# Altium PCB TennisButler PCB.PcbDoc (part 1 of 3)
Units mm, origin at the board's own origin, x right, y up, seen from the top; angles counter-clockwise.
Board outline 100 x 100 mm, 2 copper layers (Top Layer, Bottom Layer), stack 1.671 mm thick; 98 components, 100 nets, 459 pads, 232 vias.
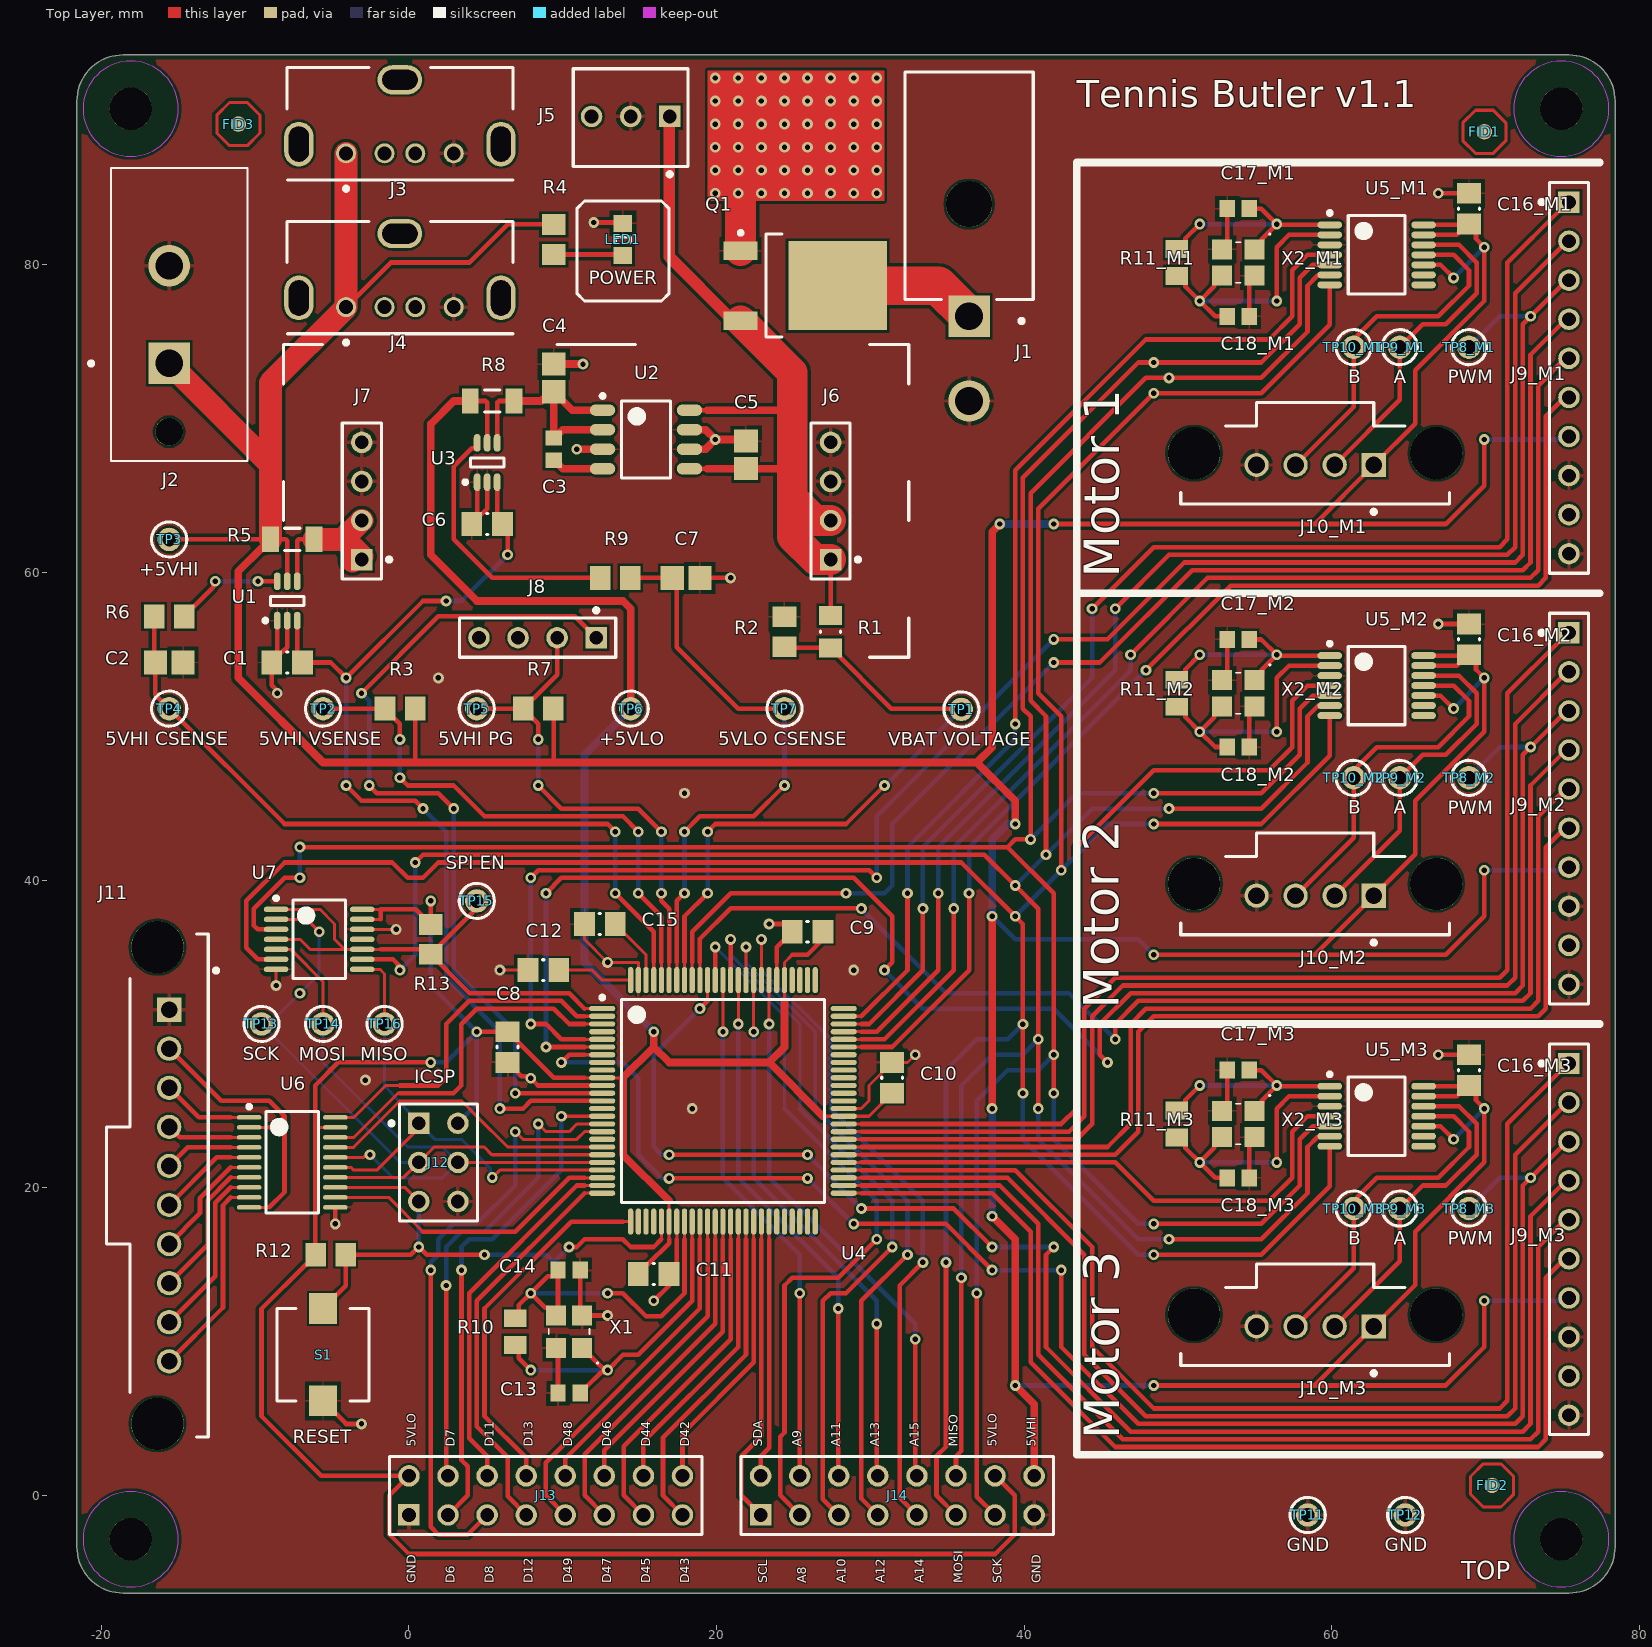
[diagram p0: Top Layer view]
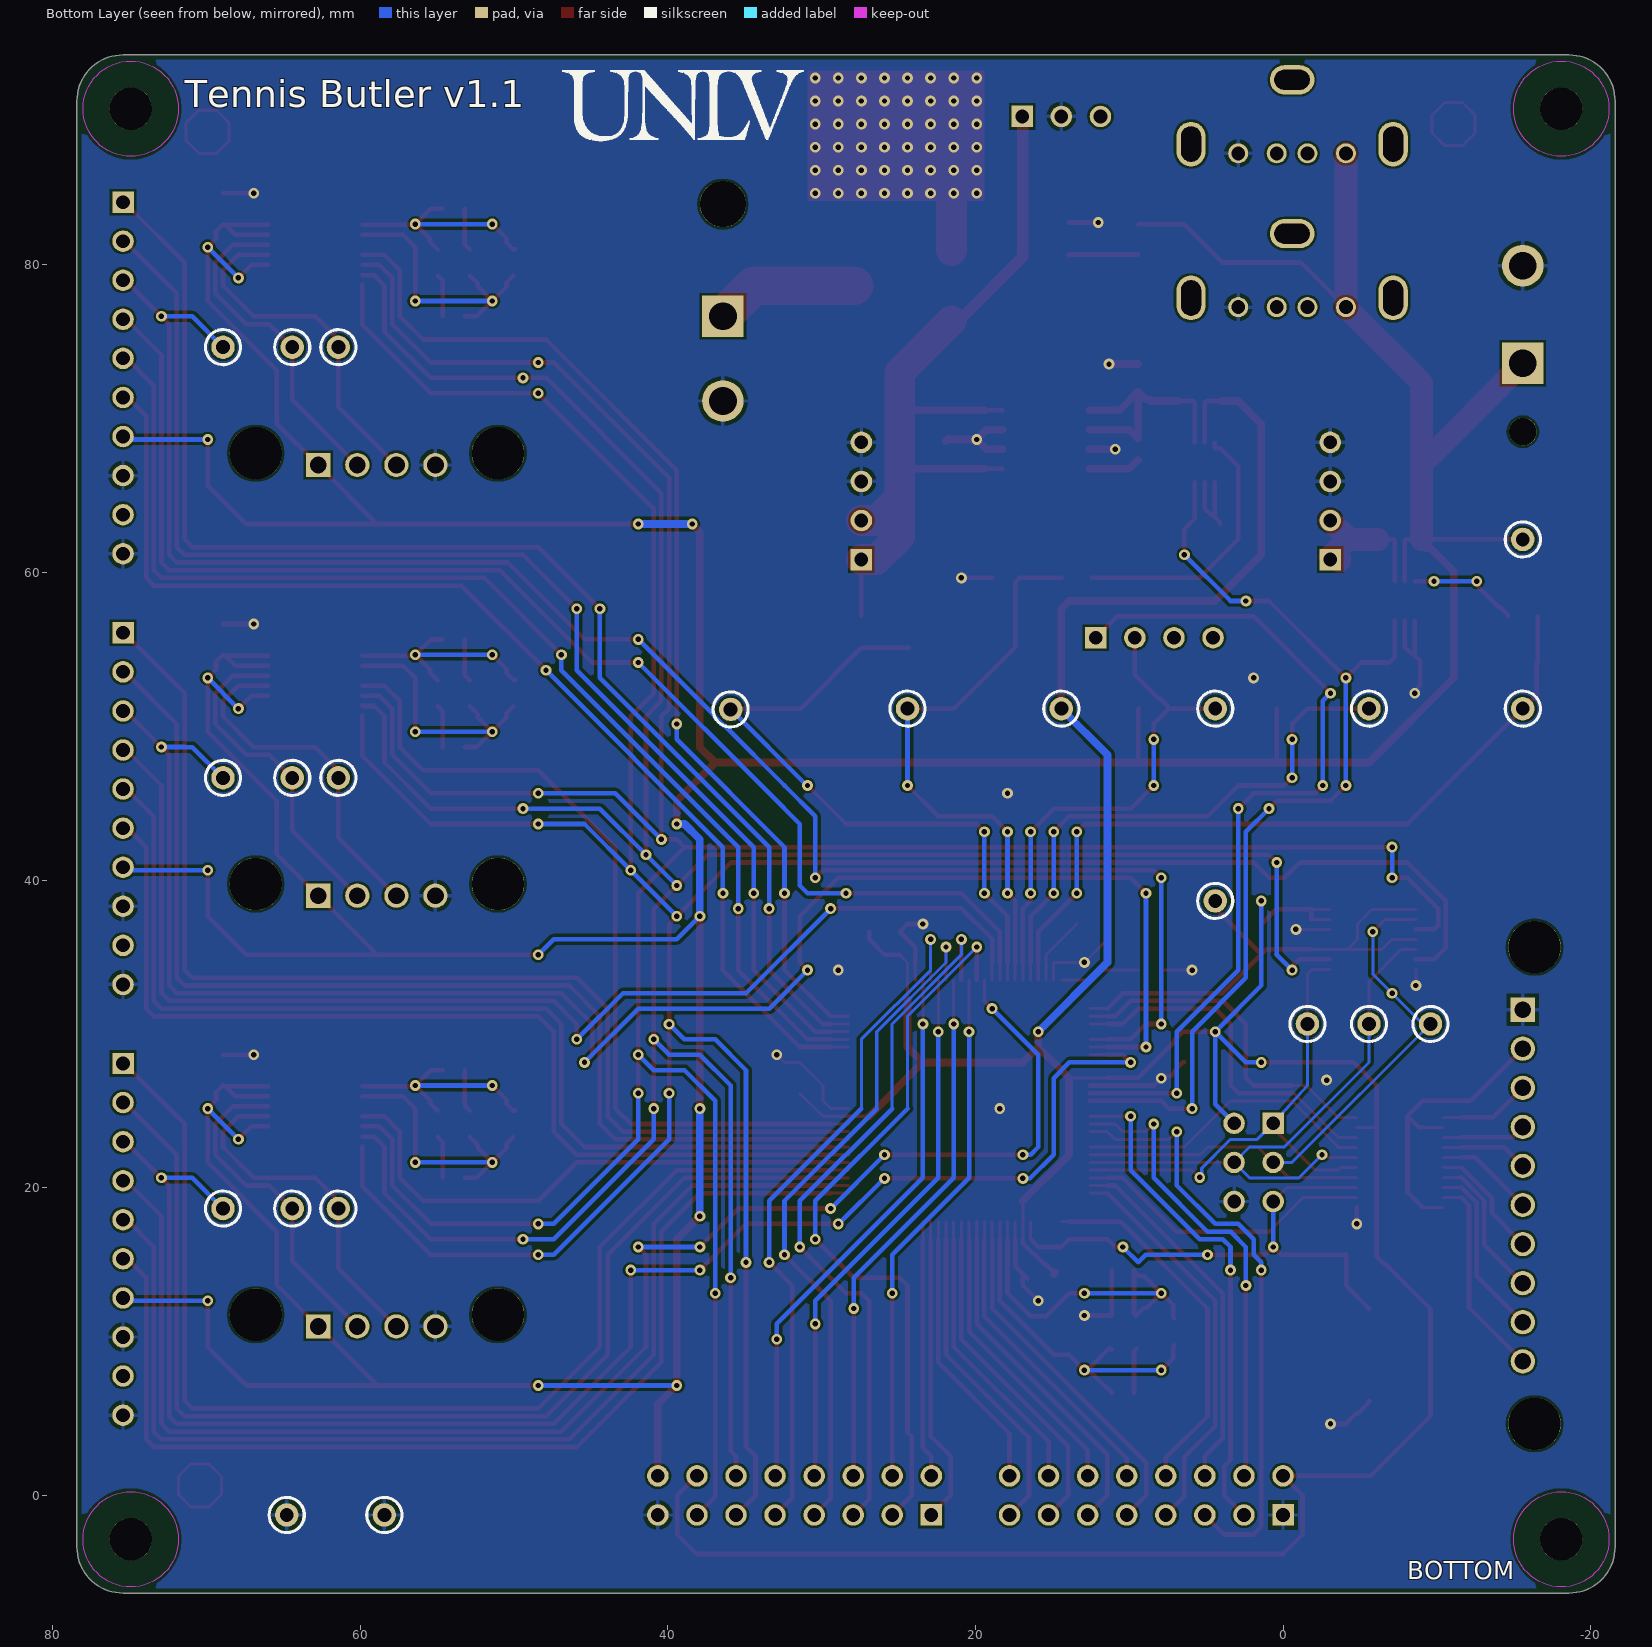
[diagram p1: Bottom Layer view, seen from below]

## Layer stack, top to bottom
Top Solder: solder mask 0.0254, SM-003, Dk 4
Top Layer: signal copper 0.0356
Dielectric 1: dielectric 1.6, FR-4, Dk 4.8
Bottom Layer: signal copper 0.0356
Bottom Solder: solder mask 0.0254, SM-003, Dk 4

## Board outline
-21.59,-3.35 -21.59,90.65 cw(c-18.59,90.65) -18.59,93.65 75.41,93.65 cw(c75.41,90.65) 78.41,90.65 78.41,-3.35 cw(c75.41,-3.35) 75.41,-6.35 -18.59,-6.35 cw(c-18.59,-3.35)

## Design rules (kind name [scope] priority, off if disabled: settings)
BoardOutlineClearance [All] p1: gap=0.3 ignorepadtopadclearanceinfootprint=FALSE
Clearance ClearanceThermalPadVias [(HasFootprint('MultiPowerSO-30-M') AND IsVia)] p1: gap=0.152 ignorepadtopadclearanceinfootprint=FALSE except(0: SMDPad-Via SMDPad-Hole THPad-Via THPad-Hole; 0.203: Arc-Fill Arc-Poly Arc-Region Track-Fill Track-Poly Track-Region; 0.305: Arc-Via Track-Via Via-Via)
Clearance ClearanceDifferentNets [All] p2: gap=0.152 ignorepadtopadclearanceinfootprint=FALSE except(0.203: Arc-Fill Arc-Poly Arc-Region Track-Fill Track-Poly Track-Region; 0.305: Arc-Via Track-Via SMDPad-Via THPad-Via Via-Via)
Clearance ClearanceSameNets [All] p3: gap=0.152 ignorepadtopadclearanceinfootprint=TRUE except(0: Arc-Arc Arc-Track Track-Track; 0.203: Arc-Fill Arc-Poly Arc-Region Track-Fill Track-Poly Track-Region; 0.305: Arc-Via Track-Via SMDPad-Via THPad-Via Via-Via)
HoleSize [All] p1: absolutevalues=TRUE maxlimit=6.3 minlimit=0.3 maxpercent=80.000 minpercent=20.000
HoleToHoleClearance [All] p1: gap=0.305 allowstackedmicrovias=TRUE
MinimumAnnularRing [All] p1: minimumring=0.152
MinimumSolderMaskSliver [All] p1: minsoldermaskwidth=0.12
PolygonConnect [All] p1: thpad.connectstyle=Relief thpad.reliefconductorwidth=0.254 thpad.reliefentries=4 thpad.polygonreliefangle="90 Angle" thpad.airgapwidth=0.254 smdpad.connectstyle=Relief smdpad.reliefconductorwidth=0.127 smdpad.reliefentries=4 smdpad.polygonreliefangle="90 Angle" smdpad.airgapwidth=0.254 via.connectstyle=Direct via.reliefconductorwidth=0.254 via.reliefentries=4 via.polygonreliefangle="90 Angle" via.airgapwidth=0.254
RoomDefinition MISC [InComponentClass('MISC')] p1: confinementstyle=ConfineIn formatcopy=TRUE lockcomponents=FALSE outline -13.97,-6.35 68.58,-6.35 68.58,3.65 -13.97,3.65
RoomDefinition SPICTL [InComponentClass('SPICTL')] p2: confinementstyle=ConfineIn formatcopy=TRUE lockcomponents=FALSE outline -12.149,29.15 6.41,29.15 6.41,42.15 -12.149,42.15
RoomDefinition SBC [InComponentClass('SBC')] p3: confinementstyle=ConfineIn formatcopy=TRUE lockcomponents=FALSE outline -20.59,0.65 5.385,0.65 5.385,39.65 -20.59,39.65
RoomDefinition POWER [InComponentClass('POWER')] p4: confinementstyle=ConfineIn formatcopy=TRUE lockcomponents=FALSE outline -21.59,46.65 42.41,46.65 42.41,93.65 -21.59,93.65
RoomDefinition MCU [InComponentClass('MCU')] p5: confinementstyle=ConfineIn formatcopy=TRUE lockcomponents=FALSE outline 4.91,2.65 33.41,2.65 33.41,38.65 4.91,38.65
RoomDefinition M3 [InComponentClass('M3')] p6: confinementstyle=ConfineIn formatcopy=TRUE lockcomponents=FALSE outline 48.41,2.65 78.41,2.65 78.41,30.65 48.41,30.65
RoomDefinition M2 [InComponentClass('M2')] p7: confinementstyle=ConfineIn formatcopy=TRUE lockcomponents=FALSE outline 48.41,30.65 78.41,30.65 78.41,58.65 48.41,58.65
RoomDefinition M1 [InComponentClass('M1')] p8: confinementstyle=ConfineIn formatcopy=TRUE lockcomponents=FALSE outline 48.41,58.65 78.41,58.65 78.41,86.65 48.41,86.65
RoomDefinition LO [InComponentClass('LO')] p9: confinementstyle=ConfineIn formatcopy=TRUE lockcomponents=FALSE outline 0.41,47.65 29.91,47.65 29.91,77.65 0.41,77.65
RoomDefinition HI [InComponentClass('HI')] p10: confinementstyle=ConfineIn formatcopy=TRUE lockcomponents=FALSE outline -18.09,46.15 42.41,46.15 42.41,84.65 -18.09,84.65
RoutingVias [All] p1: holewidth=0.35 width=0.7 viastyle="Through Hole" minholewidth=0.3 minwidth=0.6 maxholewidth=2.5 maxwidth=5
SilkToSilkClearance [All] p1: silktosilkclearance=0.127
SilkToSolderMaskClearance [IsPad OR IsVia] p1: minsilkscreentomaskgap=0.152 clearancetoexposedcopper=TRUE
SolderMaskExpansion NonPlatedHoles [PadIsPlated = 'False'] p1: expansion=0.127
SolderMaskExpansion [All] p2: expansion=0.076
UnRoutedNet [All] p1: checkbadconnections=TRUE
Width Width_6A [InNetClass('6A')] p1: maxlimit=2.54 minlimit=1.5 preferedwidth=1.5 minimp=50.000000 maximp=50.000000 favimp=50.000000
Width [All] p2: maxlimit=25.4 minlimit=0.152 preferedwidth=0.305
24 further rules are at their usual default settings.

## Classes and differential pairs
component class "Tennis Butler V1.0": FID1 FID2 FID3
component class SPICTL: R13 TP13 TP14 TP15 TP16 U7
component class SBC: J11 J12 R12 S1 U6
component class POWER: J1 J2 J3 J4 J5 Q1 R1 R2 TP1
component class MISC: J13 J14 TP11 TP12
component class MCU: C8 C9 C10 C11 C12 C13 C14 C15 R10 U4 X1
component class M3: C16_M3 C17_M3 C18_M3 J9_M3 J10_M3 R11_M3 TP8_M3 TP9_M3 TP10_M3 U5_M3 X2_M3
component class M2: C16_M2 C17_M2 C18_M2 J9_M2 J10_M2 R11_M2 TP8_M2 TP9_M2 TP10_M2 U5_M2 X2_M2
component class M1: C16_M1 C17_M1 C18_M1 J9_M1 J10_M1 R11_M1 TP8_M1 TP9_M1 TP10_M1 U5_M1 X2_M1
component class LO: C3 C4 C5 C6 C7 R8 R9 TP6 TP7 U2 U3
component class HI: C1 C2 J6 J7 J8 LED1 R3 R4 R5 R6 R7 TP2 TP3 TP4 TP5 U1
channel class "Motor Driver and Encoder": M1 M2 M3

## Components (designator, comment, footprint, x,y, rotation, side; value= is the part's Value field where it differs from the comment)
C1 "0.1uF" CAPC0805(2012)100_M -7.915,54.15 r0 top value=100nF
C2 "1uF" CAPC2013X100X50ML20T25 -15.59,54.15 r180 top
C3 "0.01uF" CAPC1608X87X35ML15T15 9.41,68.016 r90 top
C4 "10uF" CAPC2013X145X50ML20T25 9.41,72.65 r270 top
C5 "10uF" CAPC2013X145X50ML20T25 21.91,67.65 r270 top
C6 "0.1uF" CAPC0805(2012)100_M 5.085,63.15 r0 top value=100nF
C7 "1uF" CAPC2013X100X50ML20T25 18.014,59.65 r180 top
C8 "0.1uF" CAPC0805(2012)100_M 6.41,29.15 r90 top value=100nF
C9 "0.1uF" CAPC0805(2012)100_M 25.91,36.65 r0 top value=100nF
C10 "0.1uF" CAPC0805(2012)100_M 31.41,27.15 r270 top value=100nF
C11 "0.1uF" CAPC0805(2012)100_M 15.91,14.4 r180 top value=100nF
C12 "0.1uF" CAPC0805(2012)100_M 8.731,34.15 r0 top value=100nF
C13 "12pF" CAPC1608X87X35ML15T15 10.41,6.65 r0 top
C14 "12pF" CAPC1608X87X35ML15T15 10.41,14.65 r180 top
C15 "0.1uF" CAPC0805(2012)100_M 12.41,37.15 r0 top value=100nF
C16_M1 "0.1uF" CAPC0805(2012)100_M 68.91,83.65 r270 top value=100nF (schematic designator C16)
C16_M2 "0.1uF" CAPC0805(2012)100_M 68.91,55.65 r270 top value=100nF (schematic designator C16)
C16_M3 "0.1uF" CAPC0805(2012)100_M 68.91,27.65 r270 top value=100nF (schematic designator C16)
C17_M1 "12pF" CAPC1608X87X35ML15T15 53.91,83.65 r0 top (schematic designator C17)
C17_M2 "12pF" CAPC1608X87X35ML15T15 53.91,55.65 r0 top (schematic designator C17)
C17_M3 "12pF" CAPC1608X87X35ML15T15 53.91,27.65 r0 top (schematic designator C17)
C18_M1 "12pF" CAPC1608X87X35ML15T15 53.91,76.65 r180 top (schematic designator C18)
C18_M2 "12pF" CAPC1608X87X35ML15T15 53.91,48.65 r180 top (schematic designator C18)
C18_M3 "12pF" CAPC1608X87X35ML15T15 53.91,20.65 r180 top (schematic designator C18)
FID1 "Fiducial, Global" "FIDUCIAL, GLOBAL" 69.91,88.65 r0 top
FID2 "Fiducial, Global" "FIDUCIAL, GLOBAL" 70.41,0.65 r0 top
FID3 "Fiducial, Global" "FIDUCIAL, GLOBAL" -11.09,89.15 r0 top
J1 "Molex 76825-0002" "MOLEX 76825-0002" 36.41,83.95 r180 top
J2 "Molex 43255-0003" "MOLEX 43255-0003" -15.59,69.15 r90 top locked
J3 "USB" "MOLEX 105057-0001" -0.59,89.15 r0 top locked
J4 "USB" "MOLEX 105057-0001" -0.59,79.15 r0 top locked
J5 "Molex 02211-2032" "MOLEX 02211-2032" 14.41,89.65 r0 top locked
J6 "Molex 90147-1104" "MOLEX 90147-1104" 27.41,64.65 r270 top
J7 "Molex 90147-1104" "MOLEX 90147-1104" -3.07,64.65 r270 top
J8 "Molex 90147-1104" "MOLEX 90147-1104" 8.36,55.76 r0 top
J9_M1 "Molex 90147-1110" "MOLEX 90147-1110" 75.41,72.65 r90 top (schematic designator J9)
J9_M2 "Molex 90147-1110" "MOLEX 90147-1110" 75.41,44.65 r90 top (schematic designator J9)
J9_M3 "Molex 90147-1110" "MOLEX 90147-1110" 75.41,16.65 r90 top (schematic designator J9)
J10_M1 "Molex 70545-0073" "MOLEX 70545-0073" 58.91,66.99 r0 top (schematic designator J10)
J10_M2 "Molex 70545-0073" "MOLEX 70545-0073" 58.91,38.99 r0 top (schematic designator J10)
J10_M3 "Molex 70545-0073" "MOLEX 70545-0073" 58.91,10.99 r0 top (schematic designator J10)
J11 "Molex 70545-0044" "MOLEX 70545-0044" -15.59,20.15 r90 top
J12 "ICSP" "MOLEX 70287-1099" 1.91,21.65 r90 top locked
J13 "Molex 70287-1104" "MOLEX 70287-1104" 8.89,0 r180 top
J14 "Molex 70287-1104" "MOLEX 70287-1104" 31.75,0 r180 top
LED1 "POWER" 0805_A 13.91,81.65 r270 top
Q1 "IPD50P04P4L-11" DPAK228P1000X235-3M 25.41,78.65 r0 top
R1 "26.1K 1%" RESC0805(2012)_M 27.41,56.15 r90 top value="26100.00 Ohm"
R2 "10K 1%" RESC2013X70X40ML20T20#1 24.41,56.15 r270 top
R3 "1K" RESC2013X70X40ML20T20#2 -0.59,51.15 r180 top
R4 "100" RESC2013X70X40ML20T20#1 9.41,81.65 r90 top
R5 "0.01 1% 1W" RESC3216X70X50NL05T20 -7.59,62.15 r180 top
R6 "3.3K" RESC2013X70X40ML20T20#1 -15.59,57.15 r180 top
R7 "100K" RESC2013X70X40ML20T20#1 8.41,51.15 r0 top
R8 "0.1 1%" RESC3216X70X50NL05T20 5.41,71.15 r180 top
R9 "3.3K" RESC2013X70X40ML20T20#1 13.41,59.65 r0 top
R10 "1M" RESC2013X70X40NL20T20 6.91,10.65 r270 top
R11_M1 "1M" RESC2013X70X40NL20T20 49.91,80.15 r90 top (schematic designator R11)
R11_M2 "1M" RESC2013X70X40NL20T20 49.91,52.15 r90 top (schematic designator R11)
R11_M3 "1M" RESC2013X70X40NL20T20 49.91,24.15 r90 top (schematic designator R11)
R12 "100K" RESC2013X70X40ML20T20#1 -5.09,15.65 r180 top
R13 "100K" RESC2013X70X40ML20T20#1 1.41,36.15 r90 top
S1 "RESET" "E-Switch TL9210 Series Tact Switch" -5.59,9.15 r90 top
TP1 "VBAT VOLTAGE" "TEST POINT" 35.91,51.1 r90 top
TP2 "5VHI VSENSE" "TEST POINT" -5.59,51.15 r0 top
TP3 "+5VHI" "TEST POINT" -15.59,62.15 r0 top
TP4 "5VHI CSENSE" "TEST POINT" -15.59,51.15 r0 top
TP5 "5VHI PG" "TEST POINT" 4.41,51.15 r0 top
TP6 "+5VLO" "TEST POINT" 14.41,51.15 r0 top
TP7 "5VLO CSENSE" "TEST POINT" 24.41,51.15 r0 top
TP8_M1 "PWM" "TEST POINT" 68.91,74.65 r90 top (schematic designator TP8)
TP8_M2 "PWM" "TEST POINT" 68.91,46.65 r90 top (schematic designator TP8)
TP8_M3 "PWM" "TEST POINT" 68.91,18.65 r90 top (schematic designator TP8)
TP9_M1 "A" "TEST POINT" 64.41,74.65 r90 top (schematic designator TP9)
TP9_M2 "A" "TEST POINT" 64.41,46.65 r90 top (schematic designator TP9)
TP9_M3 "A" "TEST POINT" 64.41,18.65 r90 top (schematic designator TP9)
TP10_M1 "B" "TEST POINT" 61.41,74.65 r90 top (schematic designator TP10)
TP10_M2 "B" "TEST POINT" 61.41,46.65 r90 top (schematic designator TP10)
TP10_M3 "B" "TEST POINT" 61.41,18.65 r90 top (schematic designator TP10)
TP11 "GND" "TEST POINT" 58.42,-1.27 r0 top
TP12 "GND" "TEST POINT" 64.77,-1.27 r0 top
TP13 "SCK" "TEST POINT" -9.59,30.65 r0 top
TP14 "MOSI" "TEST POINT" -5.59,30.65 r0 top
TP15 "SPI EN" "TEST POINT" 4.41,38.65 r0 top
TP16 "MISO" "TEST POINT" -1.59,30.65 r0 top
U1 "INA199C2DCKR" TSOP65P240X110-6M -7.59,58.15 r90 top
U2 "LT1763IS8-5#PBF" SOIC127P600X175-8M 15.41,68.65 r0 top
U3 "INA199C2DCKR" TSOP65P240X110-6M 5.41,67.15 r90 top
U4 "ATmega2560-16AU" TSQFP50P1600X1600X120-100M 20.41,25.65 r0 top locked
U5_M1 "LS7366R-TS" TSOP65P640X110-14M 62.91,80.65 r0 top (schematic designator U5)
U5_M2 "LS7366R-TS" TSOP65P640X110-14M 62.91,52.65 r0 top (schematic designator U5)
U5_M3 "LS7366R-TS" TSOP65P640X110-14M 62.91,24.65 r0 top (schematic designator U5)
U6 "TXB0108PWR" TSOP65P640X120-20M -7.59,21.65 r0 top locked
U7 "SN74LV4T125PWR" TSOP65P640X120-14M -5.84,36.15 r0 top locked
X1 "16MHz" DFN220P320X80-4M 10.41,10.65 r90 top
X2_M1 "40MHz" DFN220P320X80-4M 53.91,80.15 r180 top (schematic designator X2)
X2_M2 "40MHz" DFN220P320X80-4M 53.91,52.15 r180 top (schematic designator X2)
X2_M3 "40MHz" DFN220P320X80-4M 53.91,24.15 r180 top (schematic designator X2)

## Footprints (in the part's own frame and the unit in brackets; to place one, negate y for a bottom-side part, rotate by r counter-clockwise, add the part's x,y. Pads: shape width x height; smd on the part's side, far side on the other; paste and mask are expansions set on the pad)
0805_A [mm] "Chip LED, 2-Leads, Body 2.0x1.3mm, IPC Medium Density"
  rect 1.1x1.2 smd: 1(-1.05,0) 2(1.05,0)
  silkscreen extent -0.15,-0.5 0.15,0.5, body extent -1,-0.62 1,0.63, height 0.68
CAPC0805(2012)100_M [mm] "Chip Capacitor, Body 2.0x1.2mm, Height 1.0mm, IPC Low Density"
  rect 1.35x1.55 smd: 1(-1,0) 2(1,0)
  silkscreen extent -0.05,-0.68 0.05,0.68, body extent -1.1,-0.72 1.1,0.72, height 1
CAPC1608X87X35ML15T15 [mm] "Chip Capacitor, 2-Leads, Body 1.60x0.80mm, IPC Low Density"
  rect 1x1.1 smd: 1(-0.725,0) 2(0.725,0)
  body extent -0.87,-0.48 0.87,0.47, height 0.87
CAPC2013X100X50ML20T25 [mm] "Chip Capacitor, 2-Leads, Body 2.00x1.25mm, IPC Low Density"
  rect 1.5x1.55 smd: 1(-0.9,0) 2(0.9,0)
  body extent -1.1,-0.72 1.1,0.72, height 1
CAPC2013X145X50ML20T25 [mm] "Chip Capacitor, 2-Leads, Body 2.00x1.25mm, IPC Low Density"
  rect 1.5x1.55 smd: 1(-0.9,0) 2(0.9,0)
  body extent -1.1,-0.72 1.1,0.72, height 1.45
DFN220P320X80-4M [mm] "DFN, 4-Leads, Body 2.50x3.20mm, Pitch 2.20mm, IPC Low Density"
  rect 1.3x1.3 smd: 1(-1.05,-0.85) 2(1.05,-0.85) 3(1.05,0.85) 4(-1.05,0.85)
  silkscreen extent -2.1,-1.9 0.18,1.32, body extent -1.68,-1.32 1.68,1.33, height 0.8
DPAK228P1000X235-3M [mm] "D-PAK, 3-Pads, Body 6.21x6.69mm (max), IPC Low Density"
  rect 2.2x1.2 smd paste-0.05: 1(-3.85,2.28) 3(-3.85,-2.28)
  rect 6.4x5.8 smd paste-1000: 2(2.45,0)
  silkscreen extent -3.97,-3.35 -1.15,3.55, body extent -4.23,-3.32 5.77,3.32, height 2.35
"E-Switch TL9210 Series Tact Switch" [mm]
  rect 2x1.8 smd: 1(-3,0) 2(3,0)
  silkscreen extent -3,-3 3,3, body extent -3.4,-3 3.4,3, height 5
"FIDUCIAL, GLOBAL" [mm] "Global Fiducial Marker for Seeed Studio Fusion PCB"
  round 1 smd mask+0.5: None(0,0)
  Top Layer lines w0.2: -1.4,-0.58 -0.58,-1.4 0.58,-1.4 1.4,-0.58 1.4,0.58 0.58,1.4 -0.58,1.4 -1.4,0.58 -1.4,-0.58
"MOLEX 02211-2032" [mil] "KK254 3-Pin Header with Friction Lock"
  rect 55x55 hole 35: 1(100,0)
  round 55 hole 35: 2(0,0) 3(-100,0)
  silkscreen extent -147,-153 147,122, body extent -147,-128 147,122, height 422
"MOLEX 43255-0003" [mm] "MLX 2-Pin PCB Header"
  rect 2.7x2.7 hole 1.8: 1(4.445,0)
  round 2.7 hole 1.8: 2(10.795,0)
  round 1.8 hole 1.8 unplated: None(0,0)
  silkscreen extent -1.91,-5.08 17.14,5.19, body extent -1.91,-5.08 17.15,3.81, height 14.73
"MOLEX 70287-1099" [mil] "C-Grid 2.54mm 6-Pin (3x2) Male Header"
  rect 55x55 hole 35: 1(100,50)
  round 55 hole 35: 2(100,-50) 3(0,50) 4(0,-50) 5(-100,50) 6(-100,-50)
  silkscreen extent -150,-100 150,125, body extent -150,-100 150,100, height 331
"MOLEX 70287-1104" [mil] "C-Grid 2.54mm 16-Pin (8x2) Male Header"
  rect 55x55 hole 35: 1(350,50)
  round 55 hole 35: 2(350,-50) 3(250,50) 4(250,-50) 5(150,50) 6(150,-50) 7(50,50) 8(50,-50) 9(-50,50) 10(-50,-50) 11(-150,50) 12(-150,-50) 13(-250,50) 14(-250,-50) 15(-350,50) 16(-350,-50)
  silkscreen extent -400,-100 400,100, body extent -400,-100 400,100, height 331
"MOLEX 70545-0044" [mil] "10-Pin SL Vertical Header with Latch and Pegs"
  rect 62x62 hole 43: 1(450,0)
  round 62 hole 43: 2(350,0) 3(250,0) 4(150,0) 5(50,0) 6(-50,0) 7(-150,0) 8(-250,0) 9(-350,0) 10(-450,0)
  round 134 hole 134 unplated: None(-610,30) None(610,30)
  silkscreen extent -644,-125 644,160, body extent -644,-100 644,160, height 466
"MOLEX 70545-0073" [mil] "4-Pin SL Vertical Header with Latch and Pegs"
  rect 62x62 hole 43: 1(150,0)
  round 62 hole 43: 2(50,0) 3(-50,0) 4(-150,0)
  round 134 hole 134 unplated: None(-310,30) None(310,30)
  silkscreen extent -344,-125 344,160, body extent -344,-100 344,160, height 466
"MOLEX 76825-0002" [mm] "Mega-Fit 2-Pin PCB Header"
  rect 2.7x2.7 hole 1.8: 1(0,7.3)
  round 2.7 hole 1.8: 2(0,12.8)
  round 3 hole 3 unplated: None(0,0)
  silkscreen extent -4.18,-8.6 4.18,7.72, body extent -4.17,-8.6 4.17,13.36, height 14.57
"MOLEX 90147-1104" [mil] "C-Grid III 2.54mm 4-Pin PC Board Connector"
  rect 55x55 hole 35: 1(150,0)
  round 55 hole 35: 2(50,0) 3(-50,0) 4(-150,0)
  silkscreen extent -200,-50 200,75, body extent -200,-50 200,50, height 336
"MOLEX 90147-1110" [mil] "C-Grid III 2.54mm 10-Pin PC Board Connector"
  rect 55x55 hole 35: 1(450,0)
  round 55 hole 35: 2(350,0) 3(250,0) 4(150,0) 5(50,0) 6(-50,0) 7(-150,0) 8(-250,0) 9(-350,0) 10(-450,0)
  silkscreen extent -500,-50 500,75, body extent -500,-50 500,50, height 336
"MOLEX 105057-0001" [mm] "CONN RCPT USB2.0 TYPEA 4POS VERT"
  round 1.3 hole 0.9: 1(-3.5,-1.9) 2(-1,-1.9) 3(1,-1.9) 4(3.5,-1.9)
  oval 1.9x2.9 hole 1.3 slot 2.3 at 90 deg: 5(-6.57,-1.3) 7(6.57,-1.3)
  oval 2.9x1.9 hole 1.3 slot 2.3 at 0 deg: 6(0,2.88)
  silkscreen extent -7.34,-4.32 7.34,3.67, body extent -7.34,-3.63 7.34,3.66, height 10.5
RESC0805(2012)_M [mm] "Chip Resistor, Body 2.0x1.3mm, IPC Low Density"
  rect 1.25x1.5 smd: 1(-1.05,0) 2(1.05,0)
  silkscreen extent -0.05,-0.65 0.05,0.65, body extent -1.1,-0.67 1.1,0.67, height 0.7
RESC2013X70X40ML20T20#1 [mm] "Chip Resistor, 2-Leads, Body 2.00x1.25mm, IPC Low Density"
  rect 1.35x1.55 smd: 1(-0.975,0) 2(0.975,0)
  body extent -1.1,-0.72 1.1,0.72, height 0.7
RESC2013X70X40ML20T20#2 [mm] "Chip Resistor, 2-Leads, Body 2.00x1.25mm, IPC Low Density"
  rect 1.35x1.55 smd: 1(-1,0) 2(0.975,0)
  body extent -1.1,-0.72 1.1,0.72, height 0.7
RESC2013X70X40NL20T20 [mm] "Chip Resistor, 2-Leads, Body 2.2x1.35mm, IPC Medium Density"
  rect 1.15x1.45 smd: 1(-0.875,0) 2(0.875,0)
  body extent -1.1,-0.72 1.1,0.72, height 0.7
RESC3216X70X50NL05T20 [mm] "Chip Resistor, 2-Leads, Body 3.20x1.60mm, IPC Medium Density"
  rect 1.1x1.65 smd: 1(-1.425,0) 2(1.425,0)
  silkscreen extent -0.5,-0.73 0.5,0.72, body extent -1.63,-0.82 1.62,0.82, height 0.7
SOIC127P600X175-8M [mm] "SOIC, 8-Leads, Body 4.90x3.90mm, Pitch 1.27mm, IPC Low Density"
  oval 1.65x0.75 smd paste-0.025: 1(-2.825,1.905) 2(-2.825,0.635) 3(-2.825,-0.635) 4(-2.825,-1.905) 5(2.825,-1.905) 6(2.825,-0.635) 7(2.825,0.635) 8(2.825,1.905)
  silkscreen extent -2.95,-2.5 1.6,2.95, body extent -3,-2.5 3,2.5, height 1.75
"TEST POINT" [mil]
  round 60 hole 35.43: 1(0,0)
  silkscreen extent -45,-45 45,45
TSOP65P240X110-6M [mm] "TSOP, 6-Leads, Body 2.00x1.25mm, Pitch 0.65mm, IPC Low Density"
  oval 1.15x0.45 smd paste-0.025: 1(-1.275,0.975) 2(-1.275,0.325) 3(-1.275,-0.325) 4(1.275,-0.325) 5(1.275,0.325) 6(1.275,0.975)
  silkscreen extent -1.4,-0.77 0.3,1.87, body extent -1.2,-0.77 1.2,1.43, height 1.1
TSOP65P640X110-14M [mm] "TSOP, 14-Leads, Body 5.00x4.40mm, Pitch 0.65mm, IPC Low Density"
  oval 1.6x0.45 smd paste-0.025: 1(-3.05,1.95) 2(-3.05,1.3) 3(-3.05,0.65) 4(-3.05,0) 5(-3.05,-0.65) 6(-3.05,-1.3) 7(-3.05,-1.95) 8(3.05,-1.95) 9(3.05,-1.3) 10(3.05,-0.65) 11(3.05,0) 12(3.05,0.65) 13(3.05,1.3) 14(3.05,1.95)
  silkscreen extent -3.17,-2.55 1.85,2.85, body extent -3.2,-2.55 3.2,2.55, height 1.1
TSOP65P640X120-14M [mm] "TSOP, 14-Leads, Body 5.00x4.40mm, Pitch 0.65mm, IPC Low Density"
  oval 1.6x0.35 smd paste-0.025: 1(-2.8,1.95) 2(-2.8,1.3) 3(-2.8,0.65) 4(-2.8,0) 5(-2.8,-0.65) 6(-2.8,-1.3) 7(-2.8,-1.95) 8(2.8,-1.95) 9(2.8,-1.3) 10(2.8,-0.65) 11(2.8,0) 12(2.8,0.65) 13(2.8,1.3) 14(2.8,1.95)
  silkscreen extent -2.92,-2.55 1.7,2.8, body extent -3.2,-2.55 3.2,2.55, height 1.2
TSOP65P640X120-20M [mm] "TSOP, 20-Leads, Body 6.50x4.40mm, Pitch 0.65mm, IPC Low Density"
  oval 1.6x0.3 smd paste-0.025: 1(-2.8,2.925) 2(-2.8,2.275) 3(-2.8,1.625) 4(-2.8,0.975) 5(-2.8,0.325) 6(-2.8,-0.325) 7(-2.8,-0.975) 8(-2.8,-1.625) 9(-2.8,-2.275) 10(-2.8,-2.925) 11(2.8,-2.925) 12(2.8,-2.275) 13(2.8,-1.625) 14(2.8,-0.975) 15(2.8,-0.325) 16(2.8,0.325) 17(2.8,0.975) 18(2.8,1.625) 19(2.8,2.275) 20(2.8,2.925)
  silkscreen extent -2.92,-3.3 1.7,3.75, body extent -3.2,-3.3 3.2,3.3, height 1.2
TSQFP50P1600X1600X120-100M [mm] "TSQFP, 100-Leads, Body 14.00x14.00mm, Pitch 0.50mm, IPC Low Density"
  oval 1.7x0.34 smd: 1(-7.85,6) 2(-7.85,5.5) 3(-7.85,5) 4(-7.85,4.5) 5(-7.85,4) 6(-7.85,3.5) 7(-7.85,3) 8(-7.85,2.5) 9(-7.85,2) 10(-7.85,1.5) 11(-7.85,1) 12(-7.85,0.5) 13(-7.85,0) 14(-7.85,-0.5) 15(-7.85,-1) 16(-7.85,-1.5) 17(-7.85,-2) 18(-7.85,-2.5) 19(-7.85,-3) 20(-7.85,-3.5) 21(-7.85,-4) 22(-7.85,-4.5) 23(-7.85,-5) 24(-7.85,-5.5) 25(-7.85,-6) 51(7.85,-6) 52(7.85,-5.5) 53(7.85,-5) 54(7.85,-4.5) 55(7.85,-4) 56(7.85,-3.5) 57(7.85,-3) 58(7.85,-2.5) 59(7.85,-2) 60(7.85,-1.5) 61(7.85,-1) 62(7.85,-0.5) 63(7.85,0) 64(7.85,0.5) 65(7.85,1) 66(7.85,1.5) 67(7.85,2) 68(7.85,2.5) 69(7.85,3) 70(7.85,3.5) 71(7.85,4) 72(7.85,4.5) 73(7.85,5) 74(7.85,5.5) 75(7.85,6)
  oval 0.34x1.7 smd: 26(-6,-7.85) 27(-5.5,-7.85) 28(-5,-7.85) 29(-4.5,-7.85) 30(-4,-7.85) 31(-3.5,-7.85) 32(-3,-7.85) 33(-2.5,-7.85) 34(-2,-7.85) 35(-1.5,-7.85) 36(-1,-7.85) 37(-0.5,-7.85) 38(0,-7.85) 39(0.5,-7.85) 40(1,-7.85) 41(1.5,-7.85) 42(2,-7.85) 43(2.5,-7.85) 44(3,-7.85) 45(3.5,-7.85) 46(4,-7.85) 47(4.5,-7.85) 48(5,-7.85) 49(5.5,-7.85) 50(6,-7.85) 76(6,7.85) 77(5.5,7.85) 78(5,7.85) 79(4.5,7.85) 80(4,7.85) 81(3.5,7.85) 82(3,7.85) 83(2.5,7.85) 84(2,7.85) 85(1.5,7.85) 86(1,7.85) 87(0.5,7.85) 88(0,7.85) 89(-0.5,7.85) 90(-1,7.85) 91(-1.5,7.85) 92(-2,7.85) 93(-2.5,7.85) 94(-3,7.85) 95(-3.5,7.85) 96(-4,7.85) 97(-4.5,7.85) 98(-5,7.85) 99(-5.5,7.85) 100(-6,7.85)
  silkscreen extent -7.97,-6.6 6.6,6.84, body extent -8,-8 8,8, height 1.2

## Part data
C1 C6 C8 C9 C10 C11 C12 C15 C16_M1 C16_M2 C16_M3: library part CMP-1036-04391-1, "CAP 100nF 6.3V ±10% 0805 (2012 Metric) Thickness 1mm SMD", Case-EIA=0805, Case-Metric=2012, Rated Voltage="6.3 V", Tolerance=Â±, Max Thickness="1 mm", Technology=SMT
  C8 C9 C10 C11 C12 C15: ClassName=MCU
C2 C7: library part CMP-2007-03677-1, Manufacturer=Kemet, Part Number=C0805C105K9RACTU
C3: library part CMP-2006-03030-1, Manufacturer=Kemet, Part Number=C0603C103J3GACTU
C4 C5: library part CMP-2007-01006-1, Manufacturer=Kemet, Part Number=C0805C106K9PACTU
C13 C14 C17_M1 C17_M2 C17_M3 C18_M1 C18_M2 C18_M3: library part CMP-2006-03475-1, Manufacturer=Kemet, Part Number=C0603C120C5GACTU
  C13 C14: ClassName=MCU
J1: "CONN HEADER R/A 2POS", Color=Black, Manufacturer=Molex, Manufacturer Part Number=76825-0002, Supplier Part Number 1=WM11969-ND, ComponentLink1Description="Datasheet 1 (Farnell)", ComponentLink1URL=http://www.farnell.com/datasheets/2216551.pdf?src-supplier=Farnell, ComponentLink2Description="Datasheet 2 (Allied Electronics)", ComponentLink2URL=http://www.alliedelec.com/images/products/datasheets/bm/BrandonData/70717238.pdf?src-supplier=Allied+Electronics, ComponentLink3Description="Datasheet 3 (Digi-Key)", ComponentLink3URL=https://www.molex.com/pdm_docs/sd/768250002_sd.pdf?src-supplier=Digi-Key, ComponentLink4Description="Datasheet 4 (Element14)", ComponentLink4URL=http://www.farnell.com/datasheets/2001779.pdf?src-supplier=Element14, ComponentLink5Description="Datasheet 5 (Element14)", ComponentLink5URL=http://www.farnell.com/datasheets/1968956.pdf?src-supplier=Element14, Contact Material=Copper, Contact Plating=Tin, Gender=Male, Number of Circuits=2, Number of Contacts=2, Number of Rows=2, Orientation="Right Angle", Pitch=5.7mm, Pricing 1="1 = 1.13000, 10 = 0.99300, 25 = 0.93440, 50 = 0.89560, 100 = 0.85670, 250 = 0.77880, 500 = 0.70092, 2016 = 0.58410, 4032 = 0.56463 (USD)", REACH SVHC=Unknown, RoHS=Yes, Stock 1=2541, Supplier 1=Digi-Key, Termination="Through Hole"
J2: "Pin & Socket Connectors 0.084 MLX Hdr 2CKT WITH PEG", Current Rating=20A, Flammability Rating="UL94 V-0", Manufacturer=Molex, Manufacturer Part Number=43255-0003, Max Operating Temperature=105°C, Min Operating Temperature=-55°C, Package Quantity=1836, Supplier Part Number 1=WM23264-ND, Voltage Rating=600V, ComponentLink1Description="Datasheet 1 (Onlinecomponents.com)", ComponentLink1URL=https://datasheet.ciiva.com/30153/7750432550003-pcb-headers-30153428.pdf?src-supplier=Onlinecomponents.com, ComponentLink2Description="Datasheet 2 (Mouser)", ComponentLink2URL=https://datasheet.ciiva.com/12919/0432550003-pcb-headers-168374-12919417.pdf?src-supplier=Mouser, Contact Gender=Male, Contact Material=Bronze, Contact Plating=Tin, Glow Wire Compliant=Non-compliant, Housing Material=Polyester, Mount="Through Hole", Number of Circuits=2, Number of Contacts=2, Number of Positions=2, Number of Rows=1, Orientation=Straight, Packaging=Tray, Pitch=6.35mm, Pricing 1="1 = 0.46000, 10 = 0.43200, 100 = 0.33140, 500 = 0.28820, 1836 = 0.23056, 5508 = 0.20895, 11016 = 0.19454 (USD)", REACH SVHC="No SVHC", RoHS 1=Yes, Stock 1=7344, Supplier 1=Digi-Key, Termination="Through Hole"
J3 J4: library part "Molex 105057-0001", "CONN RCPT USB2.0 TYPEA 4POS VERT", Color=Black, Current Rating=1.5A, Manufacturer=Molex, Manufacturer Part Number=105057-0001, Max Operating Temperature=85°C, Min Operating Temperature=-40°C, Package Quantity=2016, Supplier Part Number 1=WM8672-ND, Voltage Rating=30V, ComponentLink1Description=https://datasheet.ciiva.com/3094/1050570001-io-connectors-3094352.pdf?src-supplier=Avnet, ComponentLink1URL=https://datasheet.ciiva.com/3094/1050570001-io-connectors-3094352.pdf?src-supplier=Avnet, ComponentLink2Description=https://datasheet.ciiva.com/1098/1598467-1098017.pdf?src-supplier=Element14, ComponentLink2URL=https://datasheet.ciiva.com/1098/1598467-1098017.pdf?src-supplier=Element14, ComponentLink3Description=https://datasheet.ciiva.com/26290/1050570001-io-connectors-26290434.pdf?src-supplier=Onlinecomponents.com, ComponentLink3URL=https://datasheet.ciiva.com/26290/1050570001-io-connectors-26290434.pdf?src-supplier=Onlinecomponents.com, ComponentLink4Description=https://datasheet.ciiva.com/16142/539171050570001-io-nectors-16142942.pdf?src-supplier=Onlinecomponents.com, ComponentLink4URL=https://datasheet.ciiva.com/16142/539171050570001-io-nectors-16142942.pdf?src-supplier=Onlinecomponents.com, ComponentLink5Description=https://datasheet.ciiva.com/15181/getdatasheetpartid-152694-15181206.pdf?src-supplier=Verical, ComponentLink5URL=https://datasheet.ciiva.com/15181/getdatasheetpartid-152694-15181206.pdf?src-supplier=Verical, Connector Type=USB, Contact Material="Copper Alloy", Contact Plating=Gold, Depth=14.3mm, Features=Shielded, Gender=Receptacle, Housing Material=Thermoplastic, Length=14.68mm, Mount="Through Hole", Number of Circuits=4, Number of Contacts=4, Number of Ports=1, Number of Positions=4, Number of Terminals=4, Orientation=Vertical, Packaging=Tray, Pitch=2mm, Pricing 1="1 = 1.29000, 10 = 1.13600, 25 = 1.06880, 50 = 1.02440, 100 = 0.97990, 250 = 0.89080, 500 = 0.80172, 2016 = 0.66810, 4032 = 0.64583 (USD)", Radiation Hardening=No, REACH SVHC=Unknown, RoHS 1=Yes, Stock 1=43852, Supplier 1=Digi-Key, Termination=Solder, USB Standard="USB 2.0"
J5: library part "Molex 02211-2032 KK254 3-Pin Polarized Male Header", "KK® 254 Solid Header, Vertical, with Friction Lock, 3 Circuits, Gold (Au) Plating", Color=White, Contact Resistance=10mR, Current Rating=4A, Flammability Rating="UL94 V-0", Housing Color=Black, Insulation Resistance=50GR, Manufacturer=Molex, Manufacturer Part Number=22-11-2032, Max Operating Temperature=75°C, Min Operating Temperature=0°C, Package Quantity=2000, Supplier Part Number 1=WM2701-ND, Voltage Rating=250V, Approvals=UL, ComponentLink1Description="Datasheet 1 (Mouser)", ComponentLink1URL=https://datasheet.ciiva.com/5159/0022112032-pcb-headers-158580-5159152.pdf?src-supplier=Mouser, ComponentLink2Description="Datasheet 2 (Onlinecomponents.com)", ComponentLink2URL=https://datasheet.ciiva.com/30220/211850022112032-pcb-headers-30220272.pdf?src-supplier=Onlinecomponents.com, ComponentLink3Description="Datasheet 3 (Avnet Europe)", ComponentLink3URL=https://datasheet.ciiva.com/16656/0022112032-pcb-headers-16656147.pdf?src-supplier=Avnet+Europe, ComponentLink4Description="Datasheet 4 (Jameco)", ComponentLink4URL=https://datasheet.ciiva.com/19462/1966000-19462324.pdf?src-supplier=Jameco, ComponentLink5Description="Datasheet 5 (Jameco)", ComponentLink5URL=https://datasheet.ciiva.com/19462/233592-19462460.pdf?src-supplier=Jameco, ComponentLink6Description="Datasheet 6 (RSComponents)", ComponentLink6URL=https://datasheet.ciiva.com/11746/0900766b80d8f3a3-11746606.pdf?src-supplier=RSComponents, ComponentLink7Description="Datasheet 7 (Avnet)", ComponentLink7URL=https://datasheet.ciiva.com/10090/0022112032-pcb-headers-10090022.pdf?src-supplier=Avnet, ComponentLink8Description="Datasheet 8 (Element14)", ComponentLink8URL=https://datasheet.ciiva.com/28632/1928036-28632682.pdf?src-supplier=Element14, Contact Material=Brass, Contact Plating=Gold, Depth=9.02mm, Gender=Male, Glow Wire Compliant=Non-compliant, Halogen Free="Low Halogen", Height=14.68mm, Housing Material=Nylon, Lead Free="Lead Free", Length=95mm, Max Current Rating=4A, Mount="Through Hole", Number of Circuits=3, Number of Contacts=3, Number of Positions=3, Number of Rows=1, Orientation=Straight, Packaging=Bulk, Pitch=2.54mm, Pricing 1="1 = 0.56000, 10 = 0.52700, 100 = 0.40370, 500 = 0.35100, 1000 = 0.28958, 5000 = 0.25448, 10000 = 0.23693 (USD)", Radiation Hardening=No, REACH SVHC=Unknown, RoHS 1=Yes, Stock 1=54741, Supplier 1=Digi-Key, Termination="Through Hole", Voltage Rating (DC)=250V
J6 J7 J8: library part "Molex 90147-1104 C-Grid 4-Pin Header", "C-Grid® PC Board Connector, Single Row, Vertical, 4 Circuits, Tin (Sn) Plating", Current Rating=3A, Flammability Rating="UL94 V-0", Manufacturer=Molex, Manufacturer Part Number=90147-1104, Package Quantity=4160, Supplier Part Number 1=WM14831-ND, Voltage Rating=350V, ComponentLink1Description="Datasheet 1 (Mouser)", ComponentLink1URL=https://datasheet.ciiva.com/13565/0901471104-pcb-receptacles-176839-13565807.pdf?src-supplier=Mouser, ComponentLink2Description="Datasheet 2 (Element14)", ComponentLink2URL=https://datasheet.ciiva.com/46431/1597377-46431813.pdf?src-supplier=Element14, ComponentLink3Description="Datasheet 3 (Avnet Europe)", ComponentLink3URL=https://datasheet.ciiva.com/16733/0901471104-pcb-receptacles-16733373.pdf?src-supplier=Avnet+Europe, ComponentLink4Description="Datasheet 4 (Avnet)", ComponentLink4URL=https://datasheet.ciiva.com/10088/0901471104-pcb-receptacles-10088734.pdf?src-supplier=Avnet, ComponentLink5Description="Datasheet 5 (Avnet Europe)", ComponentLink5URL=https://datasheet.ciiva.com/16733/0901471104-pcb-receptacles-16733374.pdf?src-supplier=Avnet+Europe, Contact Material=Bronze, Contact Plating=Tin, Gender=Female, Glow Wire Compliant=Non-compliant, Housing Material=Polyester, Material=Bronze, Number of Circuits=4, Number of Contacts=4, Number of Positions=4, Number of Rows=1, Orientation=Vertical, Packaging=Rail/Tube, Pitch=2.54mm, Pricing 1="1 = 1.24000, 10 = 1.08800, 100 = 0.93830, 500 = 0.76770, 4160 = 0.61843, 8320 = 0.56725, 12480 = 0.55445 (USD)", Radiation Hardening=No, REACH SVHC=Unknown, RoHS 1=Yes, Stock 1=11420, Supplier 1=Digi-Key, Termination="Through Hole"
J9_M1 J9_M2 J9_M3: library part "Molex 90147-1110 C-Grid 10-Pin Header", "C-Grid® PC Board Connector, Single Row, Vertical, 10 Circuits, Tin (Sn) Plating", Current Rating=3A, Flammability Rating="UL94 V-0", Manufacturer=Molex, Manufacturer Part Number=90147-1110, Max Operating Temperature=125°C, Min Operating Temperature=-55°C, Package Quantity=1760, Supplier Part Number 1=WM3630-ND, Voltage Rating=350V, ComponentLink1Description="Datasheet 1 (Avnet Europe)", ComponentLink1URL=https://datasheet.ciiva.com/16732/0901471110-pcb-receptacles-16732368.pdf?src-supplier=Avnet+Europe, ComponentLink2Description="Datasheet 3 (Mouser)", ComponentLink2URL=https://datasheet.ciiva.com/30193/276430901471110-pcb-receptacles-30193986.pdf?src-supplier=Onlinecomponents.com, ComponentLink3Description="Datasheet 4 (Avnet)", ComponentLink3URL=https://datasheet.ciiva.com/5158/0901471110-pcb-receptacles-176767-5158986.pdf?src-supplier=Mouser, ComponentLink4Description="Datasheet 2 (Onlinecomponents.com)", ComponentLink4URL=https://datasheet.ciiva.com/10082/0901471110-pcb-receptacles-10082332.pdf?src-supplier=Avnet, Contact Material=Bronze, Contact Plating=Tin, Glow Wire Compliant=Non-compliant, Housing Material=Polyester, Material=Bronze, Mount="Through Hole", Number of Circuits=10, Number of Contacts=10, Number of Positions=10, Number of Rows=1, Orientation=Vertical, Packaging=Rail/Tube, Pitch=2.54mm, Pricing 1="1 = 2.53000, 10 = 2.29800, 25 = 2.15760, 50 = 2.06380, 100 = 1.97000, 250 = 1.78240, 500 = 1.64168, 1760 = 1.36024, 3520 = 1.31334 (USD)", Radiation Hardening=No, RoHS 1=Yes, Stock 1=2940, Supplier 1=Digikey, Termination=Solder
J10_M1 J10_M2 J10_M3: library part "Molex 70545-0073 SL 4-Pin Header", "CONN HEADER VERT 4POS 2.54MM, PEG", Color=Black, Contact Resistance=30mR, Current Rating=3A, Flammability Rating="UL94 V-0", Insulation Resistance=1GR, Manufacturer=Molex, Manufacturer Part Number=70545-0073, Max Operating Temperature=105°C, Min Operating Temperature=-40°C, Package Quantity=1440, Supplier Part Number 1=WM12791-ND, Voltage Rating=250V, ComponentLink1Description=Drawing, ComponentLink1URL=https://www.molex.com/pdm_docs/sd/705450073_sd.pdf, Contact Material=Bronze, Contact Plating=Gold, ELV=Compliant, Glow Wire Compliant=Non-compliant, Housing Material=Polycyclohexylenedimethylene, Material=Brass, Mount="Through Hole", Number of Circuits=4, Number of Contacts=4, Number of Positions=4, Number of Rows=1, Orientation=Vertical, Packaging=Rail/Tube, Pitch=2.54mm, Pricing 1="1 = 1.55000, 10 = 1.41000, 100 = 1.20860, 500 = 1.00712, 1440 = 0.86325, 5760 = 0.76541, 10080 = 0.74815 (USD)", RoHS 1=Yes, Stock 1=705, Supplier 1=Digikey, Termination="Through Hole", Voltage Rating (DC)=250V
J11: library part "Molex 70545-0044 SL 10-Pin Header", "CONN HEADER VERT 10POS 2.54MM, PEG", Color=Black, Contact Resistance=30mR, Current Rating=3A, Flammability Rating="UL94 V-0", Insulation Resistance=1GR, Manufacturer=Molex, Manufacturer Part Number=70545-0044, Max Operating Temperature=105°C, Min Operating Temperature=-40°C, Package Quantity=768, Supplier Part Number 1=WM4150-ND, Voltage Rating=250V, ComponentLink1Description="Datasheet 1 (Mouser)", ComponentLink1URL=https://datasheet.ciiva.com/5159/0705450044-pcb-headers-172681-5159521.pdf?src-supplier=Mouser, ComponentLink2Description="Datasheet 2 (Onlinecomponents.com)", ComponentLink2URL=https://datasheet.ciiva.com/30114/22600705450044-pcb-headers-30114382.pdf?src-supplier=Onlinecomponents.com, Contact Gender=Male, Contact Material=Bronze, Contact Plating=Gold, ELV=Compliant, Gender=Female, Glow Wire Compliant=Non-compliant, Housing Material=Thermoplastic, Material=Brass, Mount="Through Hole", Number of Circuits=10, Number of Contacts=10, Number of Positions=10, Number of Rows=1, Orientation=Vertical, Packaging=Rail/Tube, Pitch=2.54mm, Pricing 1="1 = 2.16000, 10 = 1.96000, 100 = 1.68000, 500 = 1.40000, 1000 = 1.20000, 5000 = 1.06400 (USD)", REACH SVHC=Unknown, RoHS 1=Yes, Stock 1=559, Supplier 1=Digi-Key, Termination="Through Hole", Voltage Rating (DC)=250V
J12: library part "Molex 70287-1099 6-Pin (3x2) Male Header", "CONN HEADER BKWY DL GOLD 6POS", Color=Black, Manufacturer=Molex, Manufacturer Part Number=0702871099, Max Operating Temperature=120°C, Max Voltage Rating (DC)=250V, Min Operating Temperature=-40°C, Supplier Part Number 1=0702871099-ND, ComponentLink1Description="Datasheet 1 (Avnet)", ComponentLink1URL=https://datasheet.ciiva.com/9470/0702871099-pcb-headers-9470351.pdf?src-supplier=Avnet, ComponentLink2Description="Datasheet 2 (Digi-Key)", ComponentLink2URL=https://datasheet.ciiva.com/2961/702871098-sd-2961401.pdf?src-supplier=Digi-Key, Connector Type="Male Pin", Contact Material=Brass, Contact Mating Length=0.24inch, Contact Plating=Gold, Depth=5.08mm, Housing Color=Black, Housing Material=Thermoplastic, Length=7.62mm, Mount="Through Hole", Number of Contacts=6, Number of Positions=6, Number of Rows=2, Orientation=Straight, Packaging=Bulk, Pitch=2.54mm, Radiation Hardening=No, RoHS 1=Yes, Row Spacing=0.1inch, Stock 1=0, Supplier 1=Digi-Key, Termination=Solder
J13 J14: library part "Molex 70287-1104 16-Pin (8x2) Male Header", "CONN HEADER BKWY DL GOLD 16POS", Color=Black, Manufacturer=Molex, Manufacturer Part Number=0702871104, Max Operating Temperature=120°C, Max Voltage Rating (DC)=250V, Min Operating Temperature=-40°C, Supplier Part Number 1=0702871104-ND, ComponentLink1Description="Datasheet 1 (Avnet)", ComponentLink1URL=https://datasheet.ciiva.com/10080/0702871104-pcb-headers-10080132.pdf?src-supplier=Avnet, ComponentLink2Description="Datasheet 2 (Digi-Key)", ComponentLink2URL=https://datasheet.ciiva.com/2961/702871098-sd-2961617.pdf?src-supplier=Digi-Key, Connector Type="Male Pin", Contact Material=Brass, Contact Mating Length=0.24inch, Contact Plating=Gold, Depth=5.08mm, Housing Color=Black, Housing Material=Thermoplastic, Length=20.32mm, Mount="Through Hole", Number of Contacts=16, Number of Positions=16, Number of Rows=2, Orientation=Straight, Packaging=Bulk, Pitch=2.54mm, Pricing 1="2500 = 0.79674 (USD)", RoHS 1=Yes, Row Spacing=0.1inch, Stock 1=0, Supplier 1=Digi-Key, Termination=Solder
LED1: library part CMP-1426-00008-1, "SMD mono-color Chip LED, WL-SMCW, Blue", Color=Blue, Manufacturer="Wuerth Elektronik", PartNumber=150080BS75000, ComponentLink1Description="Manufacturer URL", ComponentLink1URL=http://www.we-online.com, ComponentLink2Description=Datasheet, ComponentLink2URL=http://katalog.we-online.com/led/datasheet/150080BS75000.pdf, PackageReference=0805_A
Q1: "MOSFET P-CH 40V 50A TO252-3", Case/Package=TO-252-3, Continuous Drain Current (ID)=50A, Drain to Source Resistance=17.2mR, Drain to Source Voltage (Vdss)=-40V, Gate to Source Voltage (Vgs)=16V, Input Capacitance=3.9nF, Manufacturer=Infineon, Max Operating Temperature=175°C, Max Power Dissipation=58W, Min Operating Temperature=-55°C, Package Quantity=1, Supplier Part Number 1=IPD50P04P4L11ATMA1CT-ND, ComponentLink1Description=https://datasheet.ciiva.com/6379/infineon-ipd50p04p4l-11-ds-v01-00-en-6379847.pdf?src-supplier=Digi-Key, ComponentLink1URL=https://datasheet.ciiva.com/6379/infineon-ipd50p04p4l-11-ds-v01-00-en-6379847.pdf?src-supplier=Digi-Key, Element Configuration=Single, Fall Time=39ns, Halogen Free="Halogen Free", Height=2.3mm, Lead Free="Lead Free", Length=6.5mm, Manufacturer Part Number=IPD50P04P4L-11, Max Dual Supply Voltage=-40V, Number of Pins=3, Packaging="Tape and Reel", Pricing 1="1 = 1.10000, 10 = 0.97700, 100 = 0.77250, 500 = 0.59910, 1000 = 0.47297 (USD)", Rds On Max=10.6mR, REACH SVHC="No SVHC", Rise Time=9ns, RoHS 1=Yes, Stock 1=23273, Supplier 1=Digi-Key, Turn-Off Delay Time=46ns, Turn-On Delay Time=12ns, Width=6.22mm
R1: library part CMP-1013-00668-1, "RES SMD 26.1K OHM 1% 1/8W 0805", Case-EIA=0805, Case-Metric=2012, Power="0.125 W", Tolerance="1 %", Technology=SMT
R2: library part CMP-2001-04376-1, "RES SMD 10K OHM 1% 1/8W 0805", Manufacturer=Panasonic, Part Number=ERJ-6ENF1002V
R3: library part CMP-2001-04375-1, "RES SMD 1K OHM 1% 1/8W 0805", Manufacturer=Panasonic, Part Number=ERJ-6ENF1001V
R4: library part CMP-1665-00009-4, "Chip Resistor, 100 Ohm, +/- 1%, 0.125 W, -55 to 155 degC, 0805 (2012 Metric), RoHS, Tape and Reel", Manufacturer=Panasonic, Max Operating Temperature="155 degC", Min Operating Temperature="-55 degC", Package Quantity=5000, Voltage Rating="150 V", ComponentLink1Description="Manufacturer URL", ComponentLink1URL=http://www.panasonic.com/, ComponentLink2Description=Datasheet, ComponentLink2URL=http://industrial.panasonic.com/cdbs/www-data/pdf/RDA0000/AOA0000C86.pdf, DatasheetVersion=04/2015, Height="0.6 mm", Length="2 mm", Mount="Surface Mount", Mounting Technology="Surface Mount", PackageDescription="2-Pin Surface Mount Device, Body 2 x 1.25 mm", PackageReference=0805, Packaging="Tape and Reel", Pins=2, REACH SVHC=Yes, RoHSCompliant=true
R5: library part CMP-2003-00786-1, Manufacturer=Panasonic, Part Number=ERJ8CWFR010V
R6 R9: library part CMP-2001-00533-1, "RES SMD 3.3K OHM 1% 1/8W 0805", Manufacturer=Panasonic, Part Number=ERJ6ENF3301V
R7 R12 R13: library part CMP-2001-04377-1, "RES SMD 100K OHM 1% 1/8W 0805", Manufacturer=Panasonic, Part Number=ERJ-6ENF1003V
R8: library part CMP-2003-00708-1, Manufacturer=Panasonic, Part Number=ERJ-L08KF10CV
R10 R11_M1 R11_M2 R11_M3: library part CMP-1665-00012-4, "Chip Resistor, 1000 KOhm, +/- 1%, 0.125 W, -55 to 155 degC, 0805 (2012 Metric), RoHS, Tape and Reel", Manufacturer=Panasonic, Max Operating Temperature="155 degC", Min Operating Temperature="-55 degC", Package Quantity=5000, Voltage Rating="150 V", ComponentLink1Description="Manufacturer URL", ComponentLink1URL=http://www.panasonic.com/, ComponentLink2Description=Datasheet, ComponentLink2URL=http://industrial.panasonic.com/cdbs/www-data/pdf/RDA0000/AOA0000C86.pdf, DatasheetVersion=04/2015, Height="0.6 mm", Length="2 mm", Mount="Surface Mount", Mounting Technology="Surface Mount", PackageDescription="2-Pin Surface Mount Device, Body 2 x 1.25 mm", PackageReference=0805, Packaging="Tape and Reel", Pins=2, REACH SVHC=Yes, RoHSCompliant=true
  R10: ClassName=MCU
S1: library part "E-Switch TL9210 Series Tact Switch", "SWITCH TACTILE SPST-NO 0.05A 12V", Manufacturer=E-Switch, Manufacturer Part Number=TL9210AF260Q, Max Operating Temperature=70°C, Min Operating Temperature=-20°C, Operating Force=260gf, Supplier Part Number 1=EG2664CT-ND, ComponentLink1Description="Datasheet 1 (Mouser)", ComponentLink1URL=http://www.mouser.com/ds/2/140/e-switch_TL9210-371502.pdf?src-supplier=Mouser, ComponentLink2Description="Datasheet 2 (Digi-Key)", ComponentLink2URL=https://media.digikey.com/pdf/Data%20Sheets/E-Switch%20PDFs/TL9210.pdf?src-supplier=Digi-Key, Illumination Type=Non-Illuminated, Lead Free="Lead Free", Mechanical Life=100000Cycles, Mount="Surface Mount", Packaging="Tape and Reel", Pricing 1="1 = 0.59000, 10 = 0.56400, 25 = 0.55400, 50 = 0.53300, 100 = 0.45980, 250 = 0.41804, 500 = 0.39712 (USD)", RoHS 1=Yes, Stock 1=4135, Supplier 1=Digi-Key, Switch Function=Off-Mom, Switch Travel=1.3mm, Termination="Gull Wing", Throw Configuration=SPST
TP1 TP2 TP3 TP4 TP5 TP6 TP7 TP8_M1 TP8_M2 TP8_M3 TP9_M1 TP9_M2 TP9_M3 TP10_M1 TP10_M2 TP10_M3 TP11 TP12 TP13 TP14 TP15 TP16: library part "Test Point"
U1 U3: "IC OP AMP CURR SENSE SC70-6", Manufacturer="Texas Instruments", Max Operating Temperature=125°C, Min Operating Temperature=-40°C, Supplier Part Number 1=296-49644-1-ND, ComponentLink1Description=http://www.ti.com/lit/pdf/slyb194?src-supplier=Digi-Key, ComponentLink1URL=http://www.ti.com/lit/pdf/slyb194?src-supplier=Digi-Key, Manufacturer Part Number=INA199C2DCKR, Pricing 1="1 = 0.90000, 10 = 0.80200, 100 = 0.62540, 500 = 0.51664, 1000 = 0.40788 (USD)", RoHS 1=No, Stock 1=3000, Supplier 1=Digi-Key
U2: "IC REG LINEAR 5V 500MA 8SOIC", Case/Package=SOIC, Dropout Voltage=300mV, Manufacturer="Analog Devices / Linear Technology", Max Input Voltage=20V, Max Operating Temperature=125°C, Min Current Limit=520mA, Min Input Voltage=1.8V, Min Operating Temperature=-40°C, Nominal Output Voltage=5V, Operating Supply Current=30uA, Output Current=500mA, Package Quantity=100, Power Supply Rejection Ratio (PSRR)=65dB, Supplier Part Number 1=LT1763IS8-5#PBF-ND, ComponentLink1Description="Datasheet 2 (Farnell)", ComponentLink1URL=https://datasheet.ciiva.com/22659/1599494-22659223.pdf?src-supplier=Farnell, ComponentLink2Description="Datasheet 1 (Digi-Key)", ComponentLink2URL=https://datasheet.ciiva.com/2058/3903-2058730.pdf?src-supplier=Digi-Key, Manufacturer Part Number=LT1763IS8-5#PBF, Number of Outputs=1, Number of Pins=8, Number of Regulators=1, Output Type=Fixed, Output Voltage=5V, Packaging=Rail/Tube, Polarity=Positive, Pricing 1="1 = 5.20000, 25 = 3.45400, 100 = 2.85600, 250 = 2.71320, 500 = 2.65200 (USD)", REACH SVHC="No SVHC", RoHS 1=Yes, Stock 1=1418, Supplier 1=Digi-Key
U4: "8-bit AVR Microcontroller, 4.5-5.5V, 16MHz, 256KB Flash, 4KB EEPROM, 8KB SRAM, 86 GPIO pins, 100-pin TQFP, Industrial Grade (-40°C to 85°C), Pb-Free", Case/Package=A, Frequency=16MHz, Manufacturer="Microchip / Atmel", Manufacturer Part Number=ATMEGA2560-16AU, Max Operating Temperature=85°C, Max Supply Voltage=5.5V, Min Operating Temperature=-40°C, Min Supply Voltage=4.5V, Operating Supply Voltage=5V, Package Quantity=90, Supplier Part Number 1=ATMEGA2560-16AU-ND, Access Time=16us, ComponentLink1Description=http://www.farnell.com/datasheets/2013645.pdf?src-supplier=Element14, ComponentLink1URL=http://www.farnell.com/datasheets/2013645.pdf?src-supplier=Element14, ComponentLink2Description=http://www.farnell.com/datasheets/1817551.pdf?src-supplier=Verical, ComponentLink2URL=http://www.farnell.com/datasheets/1817551.pdf?src-supplier=Verical, ComponentLink3Description=http://www.microchip.com/mymicrochip/filehandler.aspx?ddocname=en589901&src-supplier=Digi-Key, ComponentLink3URL=http://www.microchip.com/mymicrochip/filehandler.aspx?ddocname=en589901&src-supplier=Digi-Key, ComponentLink4Description=http://www.farnell.com/datasheets/33246.pdf?src-supplier=Farnell, ComponentLink4URL=http://www.farnell.com/datasheets/33246.pdf?src-supplier=Farnell, ComponentLink5Description=http://www.alliedelec.com/images/products/datasheets/bm/ATMEL/70123980.pdf?src-supplier=Allied+Electronics, ComponentLink5URL=http://www.alliedelec.com/images/products/datasheets/bm/ATMEL/70123980.pdf?src-supplier=Allied+Electronics, ComponentLink6Description=http://www.farnell.com/datasheets/1698622.pdf?src-supplier=Farnell, ComponentLink6URL=http://www.farnell.com/datasheets/1698622.pdf?src-supplier=Farnell, ComponentLink7Description=http://datasheet.iiic.cc/atmel/ATMEGA2560-16AU.pdf?src-supplier=IIIC, ComponentLink7URL=http://datasheet.iiic.cc/atmel/ATMEGA2560-16AU.pdf?src-supplier=IIIC, ComponentLink8Description=http://www.produktinfo.conrad.com/datenblaetter/150000-174999/154804-da-01-en-ATMEGA2560_16AU_TQFP_100.pdf?src-supplier=Conrad, ComponentLink8URL=http://www.produktinfo.conrad.com/datenblaetter/150000-174999/154804-da-01-en-ATMEGA2560_16AU_TQFP_100.pdf?src-supplier=Conrad, Core Architecture=AVR, Data Bus Width=8b, Density=256KB, Height=1.05mm, Interface=2-Wire,EBI/EMI,I2C,SPI,UART,USART, Lead Free="Lead Free", Length=14.1mm, Max Frequency=16MHz, Memory Size=256KB, Memory Type=FLASH, Mount="Surface Mount", Number of ADC Channels=16, Number of I2C Channels=1, Number of I/Os=86, Number of Pins=100, Number of Programmable I/O=86, Number of PWM Channels=12, Number of SPI Channels=1, Number of Terminals=100, Number of Timers/Counters=6, Oscillator Type=Internal, Packaging=Tray, Peripherals="Brown-out Detect/Reset,POR,PWM,WDT", Pin Count=100, Pricing 1="1 = 12.21000, 25 = 11.18600, 100 = 10.13520 (USD)", Radiation Hardening=No, RAM Size=8KB, REACH SVHC="No SVHC", RoHS=Yes, Stock 1=11396, Supplier 1=Digi-Key, Termination=SMD/SMT, Watchdog Timer=Yes, Width=14.1mm
U5_M1 U5_M2 U5_M3: "32-Bit Quadrature Clock Counter with Serial Interface", Case/Package=TSSOP, Manufacturer=LSI/CSI, ComponentLink1Description=Datasheet, ComponentLink1URL=https://lsicsi.com/datasheets/LS7366R.pdf, ComponentLink2Description="Manufacturer's Website", ComponentLink2URL=https://lsicsi.com/#/products/Incremental-Encoder-Interface/LS7366R_LS7366R-S_LS7366R-TS, Lead Free="Lead Free", Manufacturer Part Number=LS7366R-TS, Number of Pins=14, Packaging=Tray, Pricing 1="1 = 3.96000, 25 = 3.16000, 100 = 2.51000, 500 = 2.01000, 1000 = 1.61000, 5000 = 1.37000, 10000 = 1.17000 (USD)", RoHS=Yes, Stock 1=10000, Supplier 1=LSI/CSI, Supplier Part Number 1=LS7366R-TS
U6: "IC, TRANSLATOR, 8BIT, BIDIRECTIONAL", Case/Package=TSSOP, High Level Output Current=-20uA, Low Level Output Current=20uA, Manufacturer="Texas Instruments", Max Operating Temperature=85°C, Max Supply Voltage=5.5V, Min Operating Temperature=-40°C, Min Supply Voltage=1.65V, Package Quantity=1, Quiescent Current=3.5uA, Supplier Part Number 1=296-21527-1-ND, ComponentLink1Description=Datasheet, ComponentLink1URL=http://www.ti.com/lit/ds/symlink/txb0108.pdf, Contact Plating=Gold, Data Rate=100Mbps, Height=1.15mm, Lead Free="Lead Free", Length=6.5mm, Logic Function=Translator, Manufacturer Part Number=TXB0108PWR, Mount="Surface Mount", Number of Bits=8, Number of Channels=8, Number of Inputs=8, Number of Pins=20, Output Current=20uA, Packaging="Tape and Reel", Pricing 1="1 = 1.55000, 10 = 1.39200, 100 = 1.11890, 500 = 0.91928, 1000 = 0.76169 (USD)", Propagation Delay=4ns, Radiation Hardening=No, REACH SVHC="No SVHC", Rise Time=7.3ns, RoHS 1=Yes, Stock 1=47771, Supplier 1=Digi-Key, Termination=SMD/SMT, Turn-On Delay Time=9.5ns, Weight=0.002716oz, Width=4.4mm
U7: "Single Power Supply Quadruple Buffer GATE w/ 3-State Output CMOS Logic Level Shifter, PW0014A, LARGE T&R", Case/Package=TSSOP, High Level Output Current=16mA, Manufacturer="Texas Instruments", Max Operating Temperature=125°C, Max Supply Voltage=5.5V, Min Operating Temperature=-40°C, Min Supply Voltage=1.6V, Package Quantity=2000, Quiescent Current=2uA, Supplier Part Number 1=296-40545-1-ND, ComponentLink1Description="Datasheet (Avnet)", ComponentLink1URL=https://datasheet.ciiva.com/48438/sn74lv4t125-48438268.pdf?src-supplier=Avnet, Lead Free="Lead Free", Logic Function=Buffer, Low Level Output Current=16mA, Manufacturer Part Number=SN74LV4T125PWR, Mount="Surface Mount", Number of Bits=4, Number of Bits per Element=1, Number of Elements=4, Number of Inputs=1, Number of Pins=14, Packaging="Tape and Reel", Pricing 1="1 = 1.05000, 10 = 0.93600, 100 = 0.72970, 500 = 0.60276, 1000 = 0.47586 (USD)", Propagation Delay=11ns, Radiation Hardening=No, REACH SVHC="No SVHC", RoHS 1=Yes, Stock 1=20583, Supplier 1=Digi-Key